# Altium PCB PCB1.PcbDoc
Units mm, origin at the board's own origin, x right, y up, seen from the top; angles counter-clockwise.
Board outline 55 x 70 mm, 2 copper layers (Top Layer, Bottom Layer); 32 components, 17 nets, 76 pads, 15 vias.
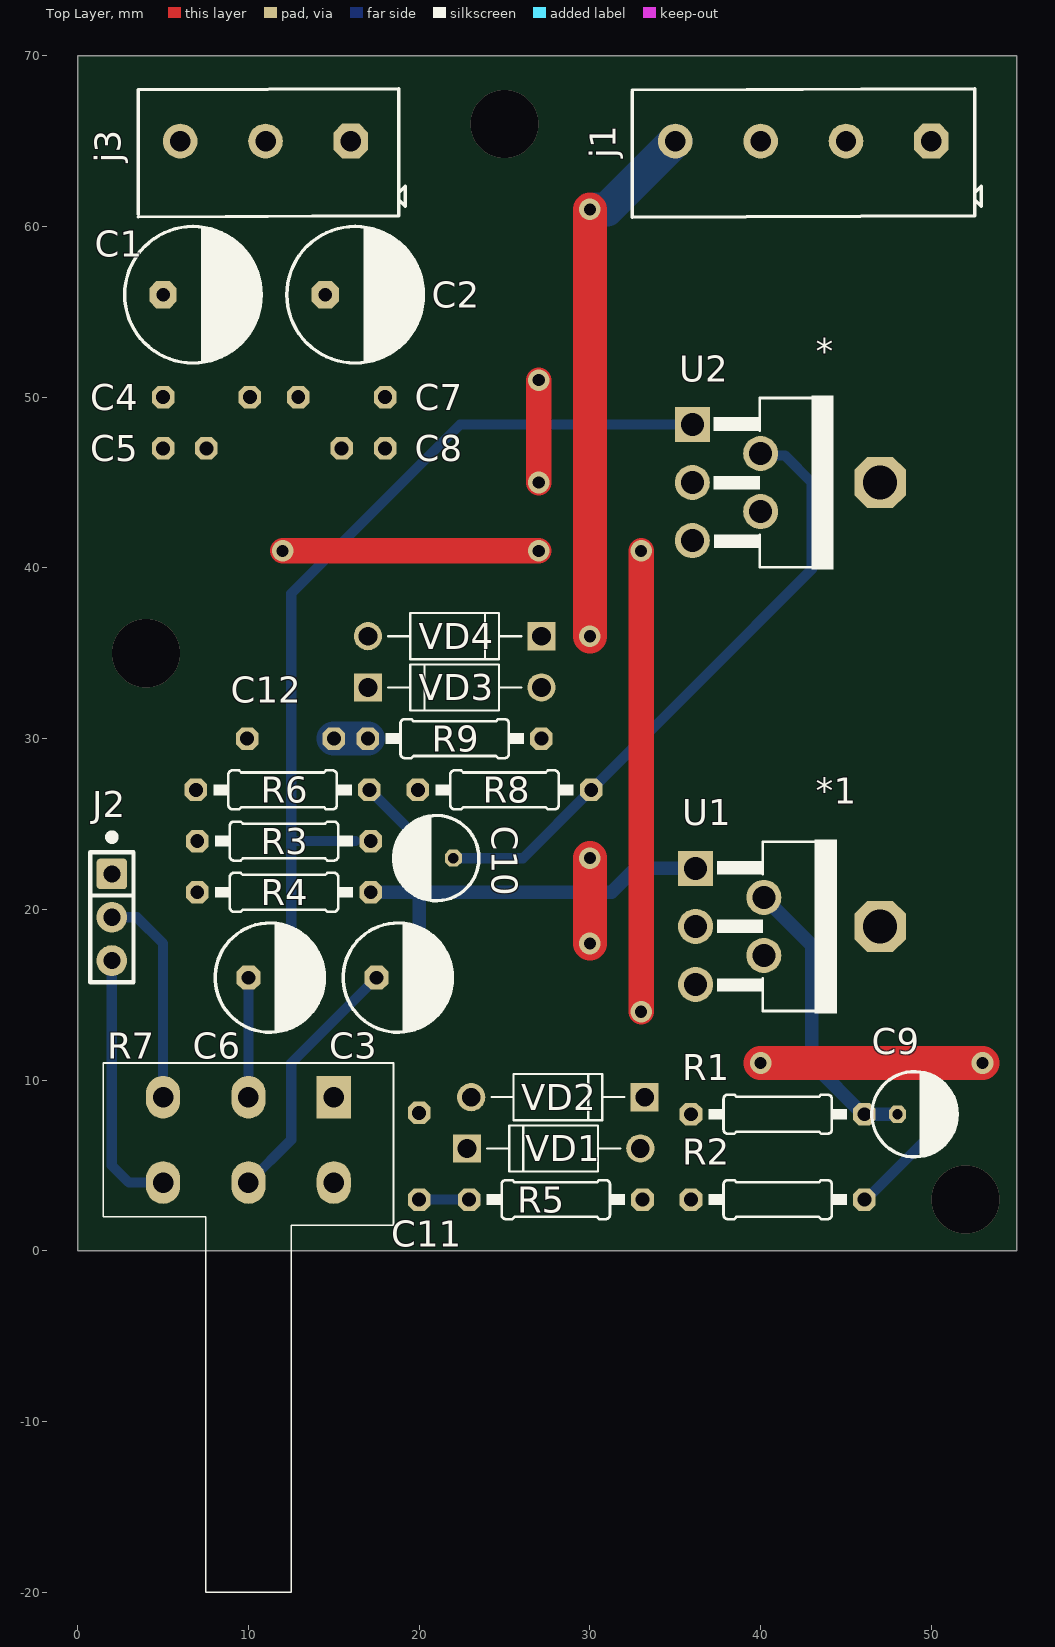
[diagram p0: Top Layer view]
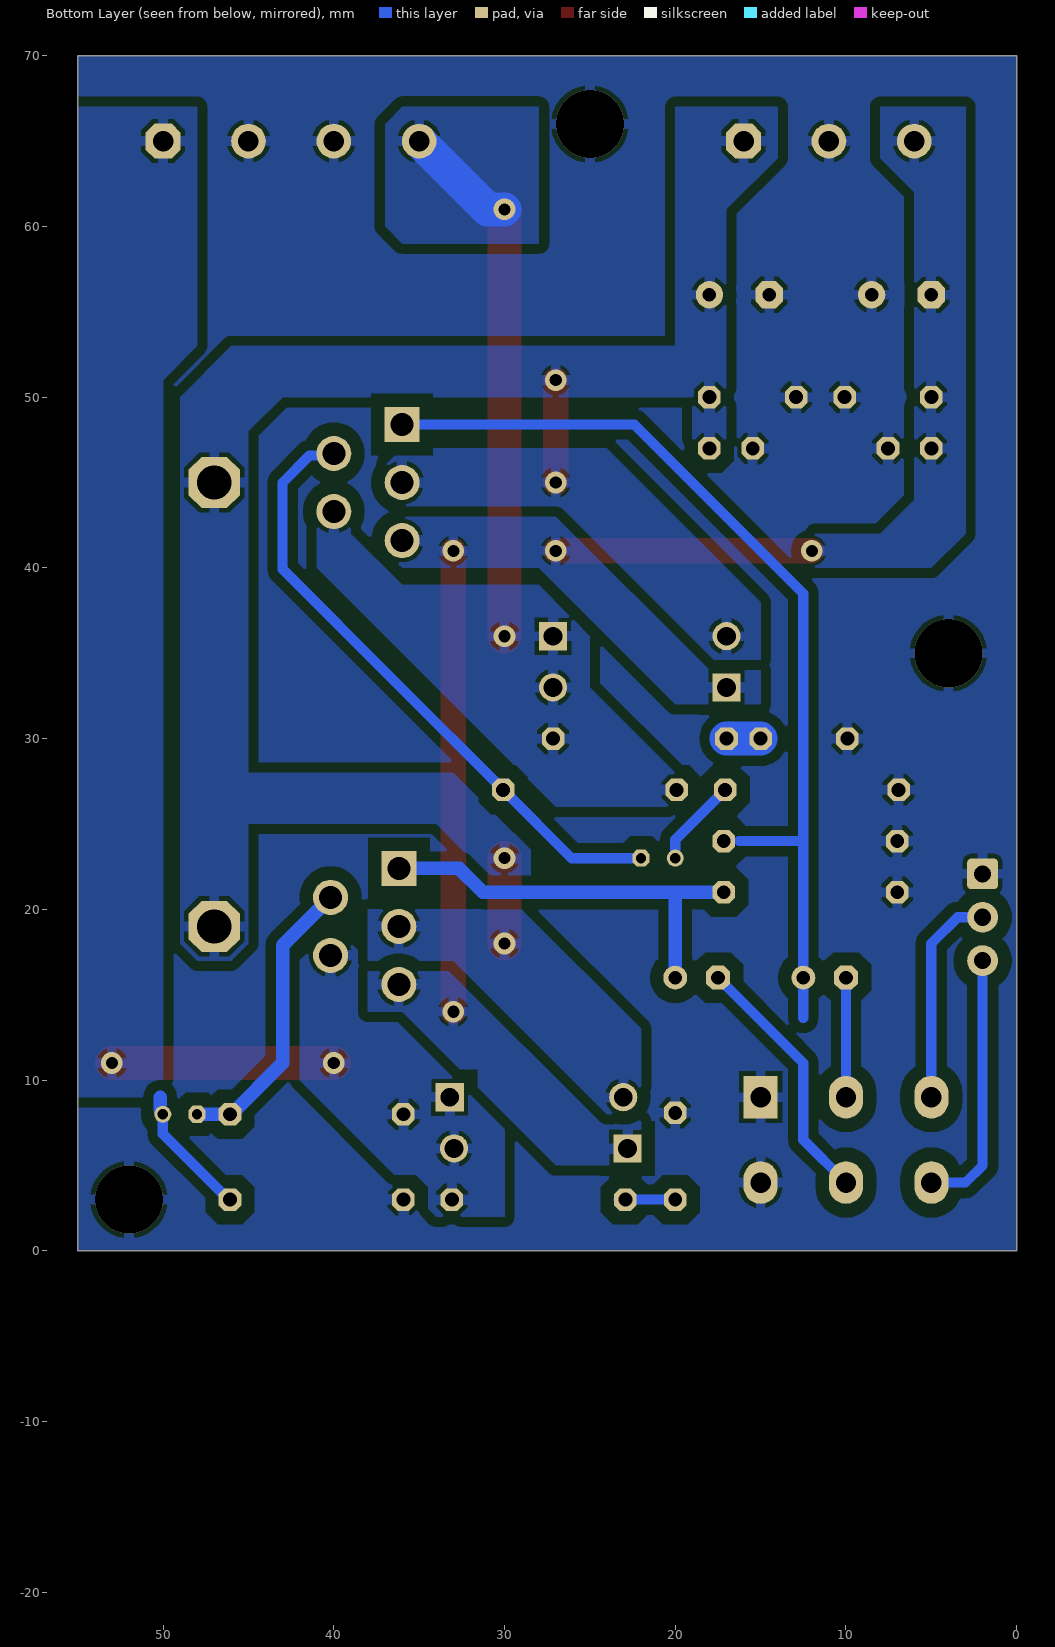
[diagram p1: Bottom Layer view, seen from below]
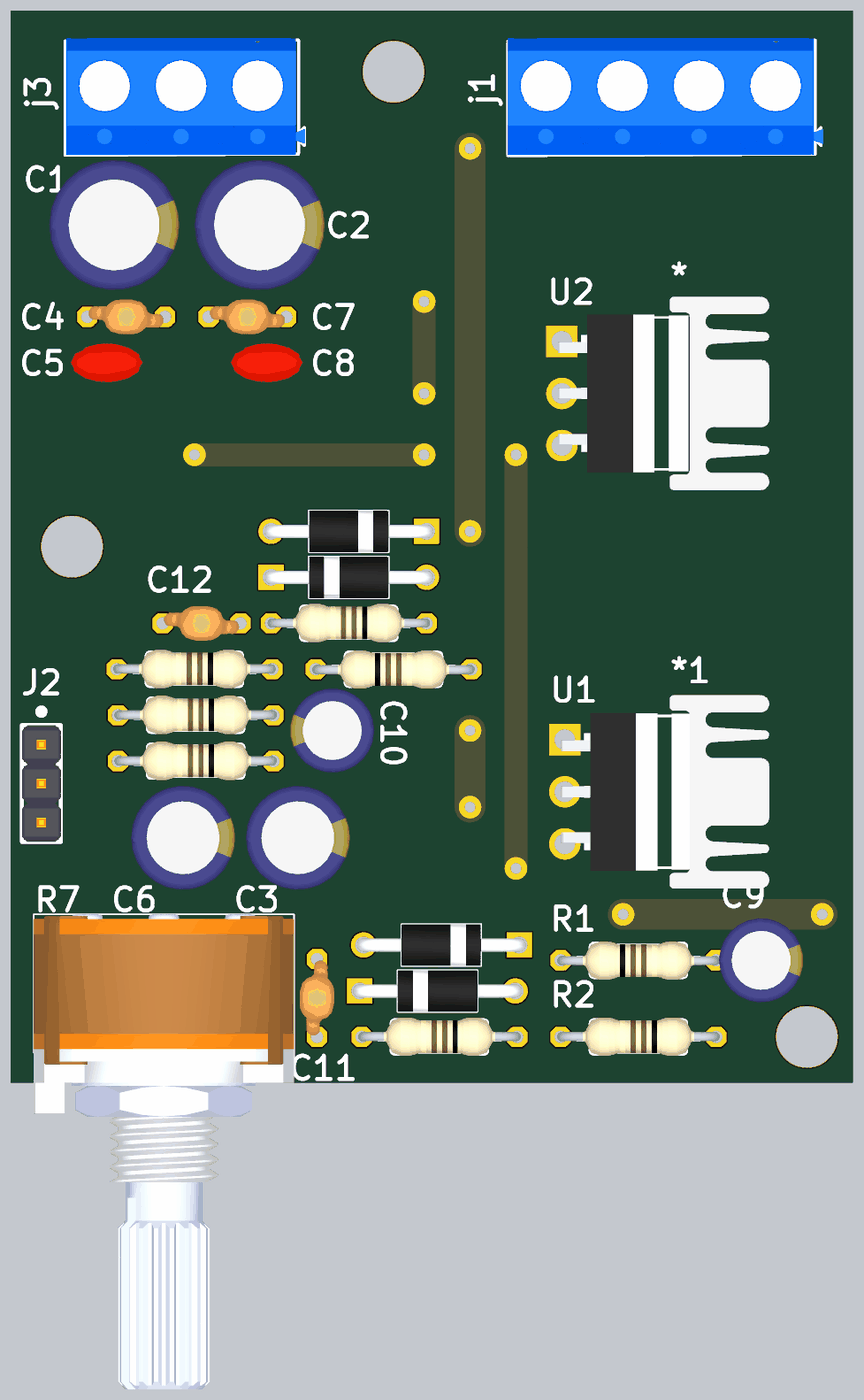
[diagram p2: 3D render of the assembled board from above, using the file's embedded part models]

## Layer stack, top to bottom
Top Solder: solder mask 0.0102, Solder Resist, Dk 3.5
Top Layer: signal copper 0.0356
Dielectric 1: dielectric 0.32, FR-4, Dk 4.8
Bottom Layer: signal copper 0.0356
Bottom Solder: solder mask 0.0102, Solder Resist, Dk 3.5

## Board outline
0,0 55,0 55,70 0,70

## Design rules (kind name [scope] priority, off if disabled: settings)
Clearance [All] p1: gap=0.6 ignorepadtopadclearanceinfootprint=FALSE except(0.8: Arc-THPad Track-THPad THPad-Fill THPad-Poly THPad-Region)
Height [All] p1: minheight=0 maxheight=1000 prefheight=12.7
PlaneClearance [All] p1: clearance=0.6
PlaneConnect [All] p1: planeconnectstyle=Direct reliefexpansion=0.508 reliefentries=4 reliefconductorwidth=0.6 reliefairgap=0.3
PolygonConnect [All] p1: connectstyle=Relief reliefconductorwidth=0.6 reliefentries=4 polygonreliefangle="90 Angle" airgapwidth=0.254
RoutingVias [All] p1: holewidth=0.711 width=1.27 viastyle="Through Hole" minholewidth=0.711 minwidth=1.27 maxholewidth=0.711 maxwidth=1.27
SolderMaskExpansion [All] p1: expansion=0.102 istentingtop=FALSE
Width [All] p1: maxlimit=2 minlimit=0.6 preferedwidth=0.6
27 further rules are at their usual default settings.

## Components (designator, comment, footprint, x,y, rotation, side; value= is the part's Value field where it differs from the comment)
* "Heatsink 1 pad transistor TO220" "Heatsink 1 pad SK95-2M3" 44.46,45 r270 top
*1 "Heatsink 1 pad transistor TO220" "Heatsink 1 pad SK95-2M3" 44.46,19 r270 top
C1 "Aluminium capacitor, 100μF, 25V, ±20%, 54mOhm, 14x10x5 mm, -55...+105°C" "CAP Electrolytic TH D8C3.5H12" 6.75,56 r0 top value=100μF
C2 "Aluminium capacitor, 100μF, 25V, ±20%, 54mOhm, 14x10x5 mm, -55...+105°C" "CAP Electrolytic TH D8C3.5H12" 16.25,56 r0 top value=100μF
C3 "Aluminium capacitor, 2.2uF, 25V, ±20%, 54mOhm, 14x10x5 mm, -55...+105°C" "CAP Electrolytic TH D6.3C2.5H11" 18.75,16 r0 top value=2.2uF
C4 "Ceramic capacitor, 220nf, X7R, ±10%, 16V, 0201, -55...+125°C" "Cap ceramic TH C050-025X075" 7.54,50 r0 top value=220nf
C5 "Ceramic capacitor, 100nF, X7R, ±10%, 16V, 0201, -55...+125°C" "Cap ceramic TH C025-024X044" 6.27,47 r0 top value=100nF
C6 "Aluminium capacitor, 2.2uF, 25V, ±20%, 54mOhm, 14x10x5 mm, -55...+105°C" "CAP Electrolytic TH D6.3C2.5H11" 11.25,16 r0 top value=2.2uF
C7 "Ceramic capacitor, 220nf, X7R, ±10%, 16V, 0201, -55...+125°C" "Cap ceramic TH C050-025X075" 15.46,50 r0 top value=220nf
C8 "Ceramic capacitor, 100nF, X7R, ±10%, 16V, 0201, -55...+125°C" "Cap ceramic TH C025-024X044" 16.73,47 r0 top value=100nF
C9 "Aluminium capacitor, 22uF, 25V, ±20%, 54mOhm, 14x10x5 mm, -55...+105°C" "CAP Electrolytic TH D5C2H11" 49.016,8 r0 top value=22uF
C10 "Aluminium capacitor, 22uF, 25V, ±20%, 54mOhm, 14x10x5 mm, -55...+105°C" "CAP Electrolytic TH D5C2H11" 21,23 r180 top value=22uF
C11 "Ceramic capacitor, 220nf, X7R, ±10%, 16V, 0201, -55...+125°C" "Cap ceramic TH C050-025X075" 20,5.54 r90 top value=220nf
C12 "Ceramic capacitor, 220nf, X7R, ±10%, 16V, 0201, -55...+125°C" "Cap ceramic TH C050-025X075" 12.46,30 r180 top value=220nf
j1 "screw terminal 1x4" "screw terminal 1x4" 50,65 r270 top
J2 "pinheader 1x3" "Pin Header 1x3 TH Pitch 2.54mm" 2,22.08 r270 top
j3 "screw terminal 1x3" "screw terminal 1x3" 16,65 r270 top
R1 "Resistor film, 22k, ±5%, 0201, 0.05W, -55...+125°C" "RES TH 0.25W H 0207$10" 41,8 r180 top value=22k
R2 "Resistor film, 680R, ±5%, 0201, 0.05W, -55...+125°C" "RES TH 0.25W H 0207$10" 41,3 r0 top value=680R
R3 "Resistor film, 22k, ±5%, 0201, 0.05W, -55...+125°C" "RES TH 0.25W H 0207$10" 12.08,24 r0 top value=22k
R4 "Resistor film, 22k, ±5%, 0201, 0.05W, -55...+125°C" "RES TH 0.25W H 0207$10" 12.08,21 r0 top value=22k
R5 "Resistor film, 1, ±5%, 0201, 0.05W, -55...+125°C" "RES TH 0.25W H 0207$10" 28,3 r0 top value=1
R6 "Resistor film, 680R, ±5%, 0201, 0.05W, -55...+125°C" "RES TH 0.25W H 0207$10" 12,27 r0 top value=680R
R7 "Resistor film, 10k, , 3296W, 0.5W, -55...+125°C" "Res VAR POT  TH 2 gang PDB182" 10,6.5 r270 top value=10k
R8 "Resistor film, 22k, ±5%, 0201, 0.05W, -55...+125°C" "RES TH 0.25W H 0207$10" 25,27 r180 top value=22k
R9 "Resistor film, 1, ±5%, 0201, 0.05W, -55...+125°C" "RES TH 0.25W H 0207$10" 22.08,30 r0 top value=1
U1 "Amp IC TDA2030AV" CB360 40,19 r270 top
U2 "Amp IC TDA2030AV" CB360 39.81,45 r270 top
VD1 "Single diode, 75V, 150mA, 1V, 4ns, SOD-323, -55...+150°C" "Diode TH DO-41 (h) (1n4007)" 28,6 r0 top
VD2 "Single diode, 75V, 150mA, 1V, 4ns, SOD-323, -55...+150°C" "Diode TH DO-41 (h) (1n4007)" 28,9 r180 top
VD3 "Single diode, 75V, 150mA, 1V, 4ns, SOD-323, -55...+150°C" "Diode TH DO-41 (h) (1n4007)" 22.207,33 r0 top
VD4 "Single diode, 75V, 150mA, 1V, 4ns, SOD-323, -55...+150°C" "Diode TH DO-41 (h) (1n4007)" 21.953,36 r180 top

## Footprints (in the part's own frame and the unit in brackets; to place one, negate y for a bottom-side part, rotate by r counter-clockwise, add the part's x,y. Pads: shape width x height; smd on the part's side, far side on the other; paste and mask are expansions set on the pad)
"Cap ceramic TH C025-024X044" [mil]
  oct 52x52 / inner round 48.04 / far side oct 52x52 hole 32: 1(-50,0) 2(50,0)
  body extent -93,-49 93,49, height 289
"Cap ceramic TH C050-025X075" [mil]
  oct 52x52 / inner round 48.04 / far side oct 52x52 hole 32: 1(-100,0) 2(100,0)
  body extent -96,-44 96,44, height 177
"CAP Electrolytic TH D5C2H11" [mm]
  oct 1x1 hole 0.6: 1(-1,0)
  round 1 hole 0.6: 2(1,0)
  silkscreen extent -2.5,-2.5 2.5,2.5, body extent -2.75,-2.75 2.75,2.75, height 13.5
"CAP Electrolytic TH D6.3C2.5H11" [mm]
  oct 1.4x1.4 hole 0.8: 1(-1.25,0)
  round 1.4 hole 0.8: 2(1.25,0)
  silkscreen extent -3.2,-3.2 3.2,3.2, body extent -3.4,-3.4 3.4,3.4, height 12.5
"CAP Electrolytic TH D8C3.5H12" [mm]
  oct 1.6x1.6 hole 0.8: 1(-1.75,0)
  round 1.6 hole 0.8: 2(1.75,0)
  silkscreen extent -4,-4 4,4, body extent -4.25,-4.25 4.25,4.25, height 13
CB360 [mm]
  rect 2.05x2.05 hole 1.35 paste-1000 mask+0: 1(-3.4,-3.81)
  round 2.05 hole 1.35 paste-1000 mask+0: 2(-1.7,0.19) 3(0,-3.81) 4(1.7,0.19) 5(3.4,-3.81)
  silkscreen extent -5.09,-2.55 5.08,4.45, body extent -5.15,-4.06 5.15,2.23, height 22.6
"Diode TH DO-41 (h) (1n4007)" [mm]
  round 1.65 hole 1.1: 1(4.953,0)
  rect 1.65x1.65 hole 1.1: 2(-5.207,0)
  silkscreen extent -4.03,-1.35 3.77,1.35, body extent -5.64,-1.36 5.39,1.36, height 2.72
"Heatsink 1 pad SK95-2M3" [mm]
  oct 3x3 / inner round 2.772 / far side oct 3x3 hole 2: 1(0,2.54)
  body extent -6.31,-1.42 6.31,5.09, height 25
"Pin Header 1x3 TH Pitch 2.54mm" [mm] "PinHeader 1x3 TH Pitch 2.54mm"
  rrect25% 1.8x1.8 hole 1: 1(0,0)
  round 1.8 hole 1: 2(2.54,0) 3(5.08,0)
  silkscreen extent -2.3,-1.27 6.35,1.27, body extent -1.27,-1.27 6.35,1.27, height 9.5
"RES TH 0.25W H 0207$10" [mil]
  oct 52x52 / inner round 48.04 / far side oct 52x52 hole 32: 1(-200,0) 2(200,0)
  silkscreen extent -159,-45 159,45, body extent -209,-48 209,50, height 89
"Res VAR POT  TH 2 gang PDB182" [mm]
  rect 2.5x2 hole 1.2: 1(-2.5,5)
  oval 2.5x2 hole 1.2: 2(-2.5,0) 3(-2.5,-5) 4(2.5,-5) 5(2.5,0) 6(2.5,5)
  silkscreen extent -4.5,-8.5 26.5,8.5, body extent -4.5,-8.5 26.5,8.5, height 22.05
"screw terminal 1x3" [mil]
  oct 80x80 hole 47.24: 1(0,0)
  round 80 hole 47.24: 2(0,-196.85) 3(0,-393.7)
  silkscreen extent -120,-490 175,125, body extent -125,-487 174,127, height 394
"screw terminal 1x4" [mil]
  oct 80x80 hole 47.24: 1(0,0)
  round 80 hole 47.24: 2(0,-196.85) 3(0,-393.7) 4(0,-590.55)
  silkscreen extent -120,-690 176,115, body extent -125,-691 174,121, height 394

## Part data
C1 C2 C3 C6 C9 C10: library part "Capacitor Aluminium", Manufacturer=Wurth, Package="14x10x5 mm", PartNumber=860080475013, Temperature=-55...+105°C, Tolerance=±20%, TypeCapacitor="Aluminium capacitor", Voltage=25V, HelpURL=https://www.digikey.com/product-detail/en/wurth-electronics-inc/860080475013/732-9029-1-ND/5728972, Impedance=54mOhm
  C1 C2: ValueManufacturerPartNumber="Aluminium capacitor, 100μF, 25V, ±20%, 54mOhm, 14x10x5 mm, -55...+105°C"
  C3 C6: ValueManufacturerPartNumber="Aluminium capacitor, 2.2uF, 25V, ±20%, 54mOhm, 14x10x5 mm, -55...+105°C"
  C9 C10: ValueManufacturerPartNumber="Aluminium capacitor, 22uF, 25V, ±20%, 54mOhm, 14x10x5 mm, -55...+105°C"
C4 C5 C7 C8 C11 C12: library part "Capacitor Ceramic", Manufacturer=Yageo, Package=0201, PartNumber=CC0201KRX7R7BB103, Temperature=-55...+125°C, Tolerance=±10%, TypeCapacitor="Ceramic capacitor", TypeDielectric=X7R, Voltage=16V, HelpURL=https://www.digikey.com/product-detail/en/yageo/CC0201KRX7R7BB103/311-1404-1-ND/2833710
  C4 C7 C11 C12: ValueManufacturerPartNumber="Ceramic capacitor, 220nf, X7R, ±10%, 16V, 0201, -55...+125°C"
  C5 C8: ValueManufacturerPartNumber="Ceramic capacitor, 100nF, X7R, ±10%, 16V, 0201, -55...+125°C"
j1: "Conn Terminal Block 4 POS 5mm Solder ST Thru-Hole 10A Box", Color=Orange, Current=20A, Current Rating=10A, Flammability Rating="UL94 V-0", Manufacturer=Weidmuller, Manufacturer Part Number=1821490000, Max Operating Temperature=120°C, Min Operating Temperature=-50°C, Package Quantity=100, Supplier Part Number 1=281-3310-ND, Voltage=300V, Approvals=CSA,cURus, Category="Terminal Blocks", ComponentLink1Description=https://media.digikey.com/pdf/Data%20Sheets/Weidmuller%20PDFs/1821490000_DS.pdf?src-supplier=Digi-Key, ComponentLink1URL=https://media.digikey.com/pdf/Data%20Sheets/Weidmuller%20PDFs/1821490000_DS.pdf?src-supplier=Digi-Key, ComponentLink2Description=http://catalog.weidmueller.com/catalog/Start.do?localeId=en&ObjectID=1821490000&src-supplier=Avnet, ComponentLink2URL=http://catalog.weidmueller.com/catalog/Start.do?localeId=en&ObjectID=1821490000&src-supplier=Avnet, ComponentLink3Description=http://catalog.weidmueller.com/catalog/Start.do?localeId=en&ObjectID=1821490000&src-supplier=Avnet+Europe, ComponentLink3URL=http://catalog.weidmueller.com/catalog/Start.do?localeId=en&ObjectID=1821490000&src-supplier=Avnet+Europe, Contact Material="Copper Alloy", Contact Plating=Tin, Hole Diameter=1.3mm, Housing Color=Orange, Housing Material=Thermoplastic, Mount="Through Hole", Number of Circuits=4, Number of Contacts=4, Number of Levels=1, Number of Poles=4, Number of Positions Per Level=4, Number of Rows=1, Orientation=Straight, Packaging=Box, Pitch=5mm, Pricing 1="1=3.28000, 10=2.48500, 25=2.30320, 50=2.07080, 100=2.02020, 250=1.76768, 500=1.61616, 1000=1.46464, 5000=1.34680 (USD)", Radiation Hardening=No, RoHS=Yes, RoHS Compliant=Yes, Series="Omnimate LM", Stock 1=135, Stripping Length=6mm, Supplier 1=Digi-Key, Termination=Screw, Voltage Rating=300V, Wire Gauge (Max)=24AWG, Wire Gauge (Min)=14AWG
J2: "SAMTEC - TSW-103-07-F-S - Pin Header, Unshrouded, Board-to-Board, 2.54 mm, 1 Rows, 3 Contacts, Through Hole, TSW Series", Color=Black, Manufacturer=Samtec, Manufacturer Part Number=TSW-103-07-F-S, Max Current Rating=7.6A, Max Operating Temperature=125°C, Max Voltage Rating (AC)=550V, Min Operating Temperature=-55°C, Package Quantity=1, Supplier Part Number 1=SAM8995-ND, Category="Headers and Wire Housings", ComponentLink1Description=https://datasheet.ciiva.com/739/tsw-xxx-xx-xxx-x-xx-xxx-mkt-739892.pdf?src-supplier=Digi-Key, ComponentLink1URL=https://datasheet.ciiva.com/739/tsw-xxx-xx-xxx-x-xx-xxx-mkt-739892.pdf?src-supplier=Digi-Key, Connector Type="Male Pin", Contact Material=Bronze, Contact Mating Length=0.23inch, Contact Plating=Gold, Contact Type="Male Pin", Depth=2.54mm, Gender=Male, Housing Color=Black, Housing Material=Polyester, Length=7.62mm, Mount="Through Hole", Number of Contacts=3, Number of Positions=3, Number of Rows=1, Orientation=Vertical, Packaging=Rail/Tube, Pitch=2.54mm, Pricing 1="1=0.41000, 10=0.35000, 100=0.27220, 500=0.23332, 1000=0.19442, 5000=0.16665, 10000=0.15554 (USD)", Radiation Hardening=No, REACH SVHC="No SVHC", RoHS=Yes, RoHS Compliant=Yes, Series=TSW, Stock 1=23568, Supplier 1=Digi-Key, Termination=Solder
j3: "PCB Terminal Block 3 Poles, 5 mm Pitch, 691101710003, Würth Elektronik", Color=Blue, Current=16A, Manufacturer="Wurth Electronics", Manufacturer Part Number=691101710003, Max Operating Temperature=105°C, Min Operating Temperature=-40°C, Package Quantity=400, Supplier Part Number 1=732-2027-ND, Voltage=250V, Category="Terminal Blocks", ComponentLink1Description=https://datasheet.ciiva.com/824/6911017100xx-824072.pdf?src-supplier=Digi-Key, ComponentLink1URL=https://datasheet.ciiva.com/824/6911017100xx-824072.pdf?src-supplier=Digi-Key, Contact Material=Brass, Contact Plating=Tin, Current Rating=16A, Height=16.4mm, Housing Material=PA66, Length=9mm, Mount="Through Hole", Number of Contacts=3, Number of Levels=1, Number of Positions Per Level=3, Packaging=Bulk, Pitch=0.197inch, Plating=Steel, Pricing 1="1=0.96000, 10=0.86200, 50=0.74500, 100=0.69120 (USD)", REACH SVHC=Unknown, RoHS=Yes, RoHS Compliant=Yes, Series="WR-TBL Series 101", Stock 1=955, Stripping Length=-7mm, Supplier 1=Digi-Key, Termination=Screw, Voltage Rating=250V, Width=16.2mm, Wire Gauge (Max)=26AWG, Wire Gauge (Min)=14AWG, Wire/Cable Gauge=26AWG
R1 R2 R3 R4 R5 R6 R8 R9: library part "Resistor Fixed", Manufacturer=Yageo, Package=0201, PartNumber=RC0201JR-07100RL, Power=0.05W, Temperature=-55...+125°C, Tolerance=±5%, TypeResistor="Resistor film", HelpURL=https://www.digikey.com/product-detail/en/yageo/RC0201JR-07100RL/311-100NCT-ND/1949006
  R1 R3 R4 R8: ValueManufacturerPartNumber="Resistor film, 22k, ±5%, 0201, 0.05W, -55...+125°C"
  R2 R6: ValueManufacturerPartNumber="Resistor film, 680R, ±5%, 0201, 0.05W, -55...+125°C"
  R5 R9: ValueManufacturerPartNumber="Resistor film, 1, ±5%, 0201, 0.05W, -55...+125°C"
R7: library part "Resistor Potentiometer 2 Gang", Manufacturer=Bourns, Package=3296W, PartNumber=3296W-1-103LF, Power=0.5W, Temperature=-55...+125°C, TypeResistor="Resistor film", HelpURL=https://www.digikey.com/product-detail/en/bourns-inc/3296W-1-103LF/3296W-103LF-ND/1088045, ValueManufacturerPartNumber="Resistor film, 10k, , 3296W, 0.5W, -55...+125°C"
U1 U2: "STMICROELECTRONICS         TDA2030AV.             Audio Power Amplifier, 18 W, 5 Pins", Dual Supply Voltage=18V, Input Bias Current=2uA, Input Offset Voltage (Vos)=20mV, Manufacturer=STMicroelectronics, Manufacturer Part Number=TDA2030AV, Max Dual Supply Voltage=22V, Max Operating Temperature=150°C, Max Output Current=3.5A, Max Output Power=18W, Max Power Dissipation=20W, Min Dual Supply Voltage=6V, Min Operating Temperature=-40°C, Nominal Supply Current=80mA, Package="Pentawatt-5 STMicroelectronics", Package Quantity=50, Power Supply Rejection Ratio (PSRR)=54dB, Supplier Part Number 1=497-2165-5-ND, Voltage Gain=80dB, Availability=Unavailable, Bandwidth=100kHz, Category="Amplifiers - Audio", ComponentLink1Description=https://datasheet.ciiva.com/15131/getdatasheetpartid-129946-15131656.pdf?src-supplier=Verical, ComponentLink1URL=https://datasheet.ciiva.com/15131/getdatasheetpartid-129946-15131656.pdf?src-supplier=Verical, ComponentLink2Description=https://datasheet.ciiva.com/14153/wltda2030a-data-en-14153246.pdf?src-supplier=Distrelec, ComponentLink2URL=https://datasheet.ciiva.com/14153/wltda2030a-data-en-14153246.pdf?src-supplier=Distrelec, ComponentLink3Description=https://datasheet.ciiva.com/4767/cd00000129-102656-4767379.pdf?src-supplier=Mouser, ComponentLink3URL=https://datasheet.ciiva.com/4767/cd00000129-102656-4767379.pdf?src-supplier=Mouser, ComponentLink4Description=https://datasheet.ciiva.com/19480/1416796-19480428.pdf?src-supplier=Jameco, ComponentLink4URL=https://datasheet.ciiva.com/19480/1416796-19480428.pdf?src-supplier=Jameco, ComponentLink5Description=https://datasheet.ciiva.com/26842/tda2030av-26842465.pdf?src-supplier=IIIC, ComponentLink5URL=https://datasheet.ciiva.com/26842/tda2030av-26842465.pdf?src-supplier=IIIC, ComponentLink6Description=https://datasheet.ciiva.com/1481/cd00000129-1481701.pdf?src-supplier=Element14, ComponentLink6URL=https://datasheet.ciiva.com/1481/cd00000129-1481701.pdf?src-supplier=Element14, ComponentLink7Description=https://datasheet.ciiva.com/1789/cd00000129-1789157.pdf?src-supplier=Digi-Key, ComponentLink7URL=https://datasheet.ciiva.com/1789/cd00000129-1789157.pdf?src-supplier=Digi-Key, ComponentLink8Description=https://datasheet.ciiva.com/18417/70014117-18417402.pdf?src-supplier=Allied+Electronics, ComponentLink8URL=https://datasheet.ciiva.com/18417/70014117-18417402.pdf?src-supplier=Allied+Electronics, ComponentLink9Description=https://datasheet.ciiva.com/2967/cd00000129-2967841.pdf?src-supplier=Avnet, ComponentLink9URL=https://datasheet.ciiva.com/2967/cd00000129-2967841.pdf?src-supplier=Avnet, Gain=80dB, Gain Bandwidth Product=100kHz, Height=9.2mm, Lead Free="Lead Free", Length=10.4mm, Load Impedance=4R, Max Supply Voltage=22V, MF=STMicroelectronics, Mount="Through Hole", MP=TDA2030AV, Number of Channels=1, Number of Pins=5, Output Current=3.5A, Output Power=18W, Packaging=Rail/Tube, Power Dissipation=20W, Price=None, Quiescent Current=80mA, Radiation Hardening=No, REACH SVHC="No SVHC", RoHS=Yes, RoHS Compliant=Yes, Series=-, SnapEDA_Link=https://www.snapeda.com/parts/TDA2030AV/STMicroelectronics/view-part/49020/?ref=snap, Supplier 1=Digi-Key, Supply Current=80mA, Supply Type=Dual, Width=4.8mm
VD1 VD2 VD3 VD4: library part "Diode single", Current=150mA, Manufacturer="Micro Commercial", Package=SOD-323, PartNumber=1N4148WX-TP, Temperature=-55...+150°C, Voltage=75V, VoltageDrop=1V, HelpURL=https://www.digikey.com/product-detail/en/micro-commercial-co/1N4148WX-TP/1N4148WXTPMSCT-ND/717312, RecoveryTime=4ns, TypeDiode="Single diode", ValueManufacturerPartNumber="Single diode, 75V, 150mA, 1V, 4ns, SOD-323, -55...+150°C"

## Via types
v1: diameter 1.27, hole 0.711, Top Layer to Bottom Layer, 12 vias
v2: diameter 4, hole 4, Top Layer to Bottom Layer, 3 vias

## Nets (pads, with @x,y where several pads share a name; then routed paths per layer and width w, separated by ;. In a path a pad name is that pad's centre, name@x,y a point inside that pad or via, vN(x,y) a via of type N, cw(c..) or ccw(c..) an arc to the next point about the centre after c; other vN are vias at no path point)
-Vs: *1.1 *.1 C2.2 C7.2 C8.2 j3.1 U1.3 U2.3 VD2.1 VD4.1 | length 11
  Top Layer w1.5: v1(27,45) v1(27,51)
  Top Layer w2: v1(30,18) v1(30,23)
GND: C1.2 C2.1 C4.2 C5.2 C7.1 C8.1 C11.2 C12.2 j1.2 j1.3 J2.1 j3.2 R2.1 R3.1 R4.1 R6.1 R7.1 R7.6
  other v2: 52,3 4,35 25,66
NetC3_1: C3.1 R7.5 | length 15.1
  Bottom Layer w0.6: R7.5 12.502,6.502 12.502,11.002 C3.1
NetC3_2: C3.2 R4.2 U1.1 | length 24.8
  Bottom Layer w0.8: R4.2@17.08,21 20,21 ; R4.2 R4.2@17.164,20.996 ; C3.2@19.956,16.044 C3.2 20,21 ; U1.1 32.66,22.4 31.26,21 20,21
NetC6_1: C6.1 R7.2 | length 7
  Bottom Layer w0.6: R7.2 C6.1
NetC6_2: C6.2 R3.2 U2.1 | length 56.2
  Bottom Layer w0.6: 12.5,13.641 C6.2 12.5,24 ; 16.262,24 12.5,24 ; U2.1 22.4,48.4 12.5,38.5 12.5,24
NetC9_1: C9.1 R1.1 U1.2 | length 17.1
  Bottom Layer w0.8: U1.2 43,17.89 43,11 R1.1@46.04,7.96 ; R1.1 C9.1@48,8
NetC9_2: C9.2 R2.2 | length 7.7
  Bottom Layer w0.6: R2.2@46.16,3 50.016,6.856 C9.2
  Bottom Layer w0.8: C9.2 50.016,8.054 50.171,8.21 50.171,9
NetC10_1: C10.1 R8.1 U2.2 | length 36.8
  Bottom Layer w0.6: C10.1 26.08,23 R8.1 36.339,33.259 43,39.92 43,45 41.411,46.589 40.111,46.589 U2.2
NetC10_2: C10.2 R6.2 | length 5.2
  Bottom Layer w0.6: R6.2 20,24.08 C10.2
NetC11_1: C11.1 R5.1 | length 3.3
  Bottom Layer w0.6: C11.1 R5.1 R5.1@23.312,3
NetC12_1: C12.1 R9.1 | length 2
  Bottom Layer w2: C12.1 R9.1
Netj1_1: j1.1 R1.2 R5.2 U1.4 VD1.1 VD2.2 | length 13
  Top Layer w2: v1(40,11) v1(53,11)
Netj1_4: j1.4 R8.2 R9.2 U2.4 VD3.1 VD4.2 | length 31.7
  Top Layer w2: v1(30,36) v1(30,61)
  Bottom Layer w2: v1(30,61) 31,61 j1.4
NetJ2_2: J2.2 R7.3 | length 12.6
  Bottom Layer w0.6: J2.2 3.46,19.54 5,18 R7.3
NetJ2_3: J2.3 R7.4 | length 15.4
  Bottom Layer w0.6: J2.3 2,5 3,4 R7.4
Vs: C1.1 C4.1 C5.1 j3.3 U1.5 U2.5 VD1.2 VD3.2 | length 42
  Top Layer w1.5: v1(12,41) v1(27,41) ; v1(33,14) v1(33,41)

## Polygon pours and split planes (outlines as drawn)
GND on Bottom Layer "GND_L02_P011" (solid, pour order 11): 0,0 55,0 55,70 0,70
Netj1_4 on Bottom Layer "NETJ1_4_L02_P010" (solid, pour order 10): 28,59 36,59 37,60 37,66 36,67 28,67
Netj1_4 on Bottom Layer "NETJ1_4_L02_P004" (solid, pour order 4): 40,45 39,44 39,42 36,39 28,39 25,36 25,33 19,27 20,26 27,26 41,40 41,44
-Vs on Bottom Layer "-VS_L02_P001" (solid, pour order 1): 14,67 14,64 17,61 17,47 18,46 19,47 19,50 43,50 45,48 45,18 46,17 48,17 49,18 49,50 46,53 20,53 20,67
-Vs on Bottom Layer "-VS_L02_P003" (solid, pour order 3): 36,43 37,44 37,46 36,47 24,47 15,38 15,34 18,34 27,43
Vs on Bottom Layer "VS_L02_P002" (solid, pour order 2): 36,43 37,42 37,41 36,40 28,40 20,32 15,32 15,34 18,34 27,43
-Vs on Bottom Layer "-VS_L02_P006" (solid, pour order 6): 29,20 38,20 38,17 33,17 24,8 22,8 22,13
Netj1_1 on Bottom Layer "NETJ1_1_L02_P008" (solid, pour order 8): 30,8 30,2 34,2 42,10 42,17 41,18 39,18 38,17 38,14 36,14
Vs on Bottom Layer "VS_L02_P007" (solid, pour order 7): 24,8 33,17 38,17 38,14 36,14 27,5 22,5 22,8
Netj1_1 on Bottom Layer "NETJ1_1_L02_P009" (solid, pour order 9): 55,9 55,67 48,67 48,53 50,51 50,9
-Vs on Bottom Layer "-VS_L02_P005" (solid, pour order 5): 46,25 34,25 31,22 28.479,22 28.479,23.479 33,28 46,28
Vs on Bottom Layer "VS_L02_P000" (solid, pour order 0): 3,67 8,67 8,64 6,62 6,44 8,42 12,42 13,41 12,40 5,40 3,42